# Altium PCB PCB01.PcbDoc
Units mil, origin at the board's own origin, x right, y up, seen from the top; angles counter-clockwise.
Board outline 3937.01 x 3937.01 mil, 2 copper layers (Top Layer, Bottom Layer); 3 components, 2 nets, 6 pads, 0 vias.
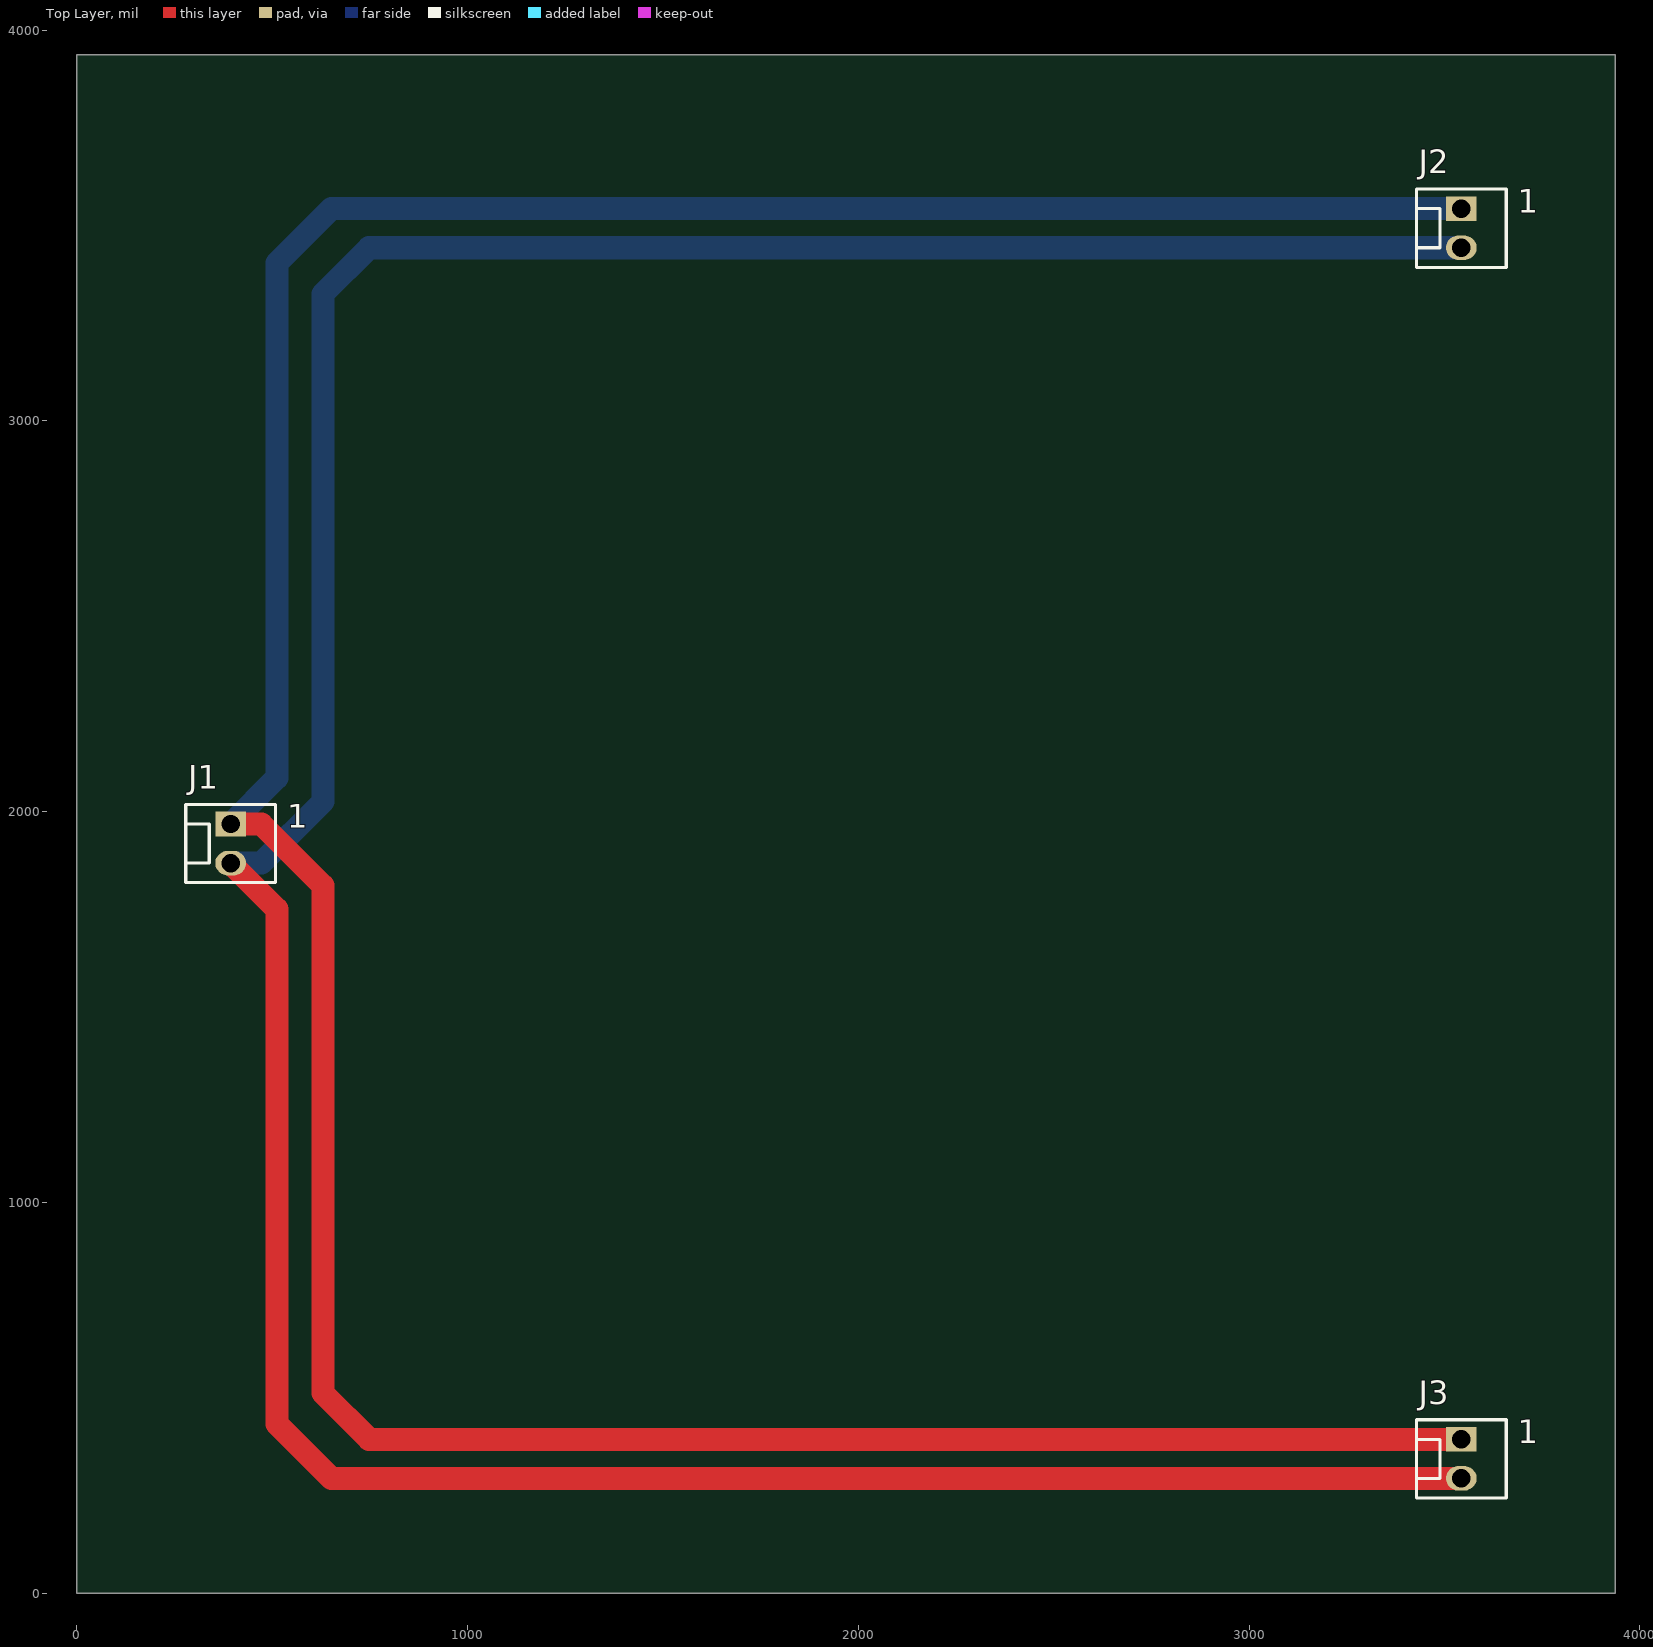
[diagram p0: Top Layer view]
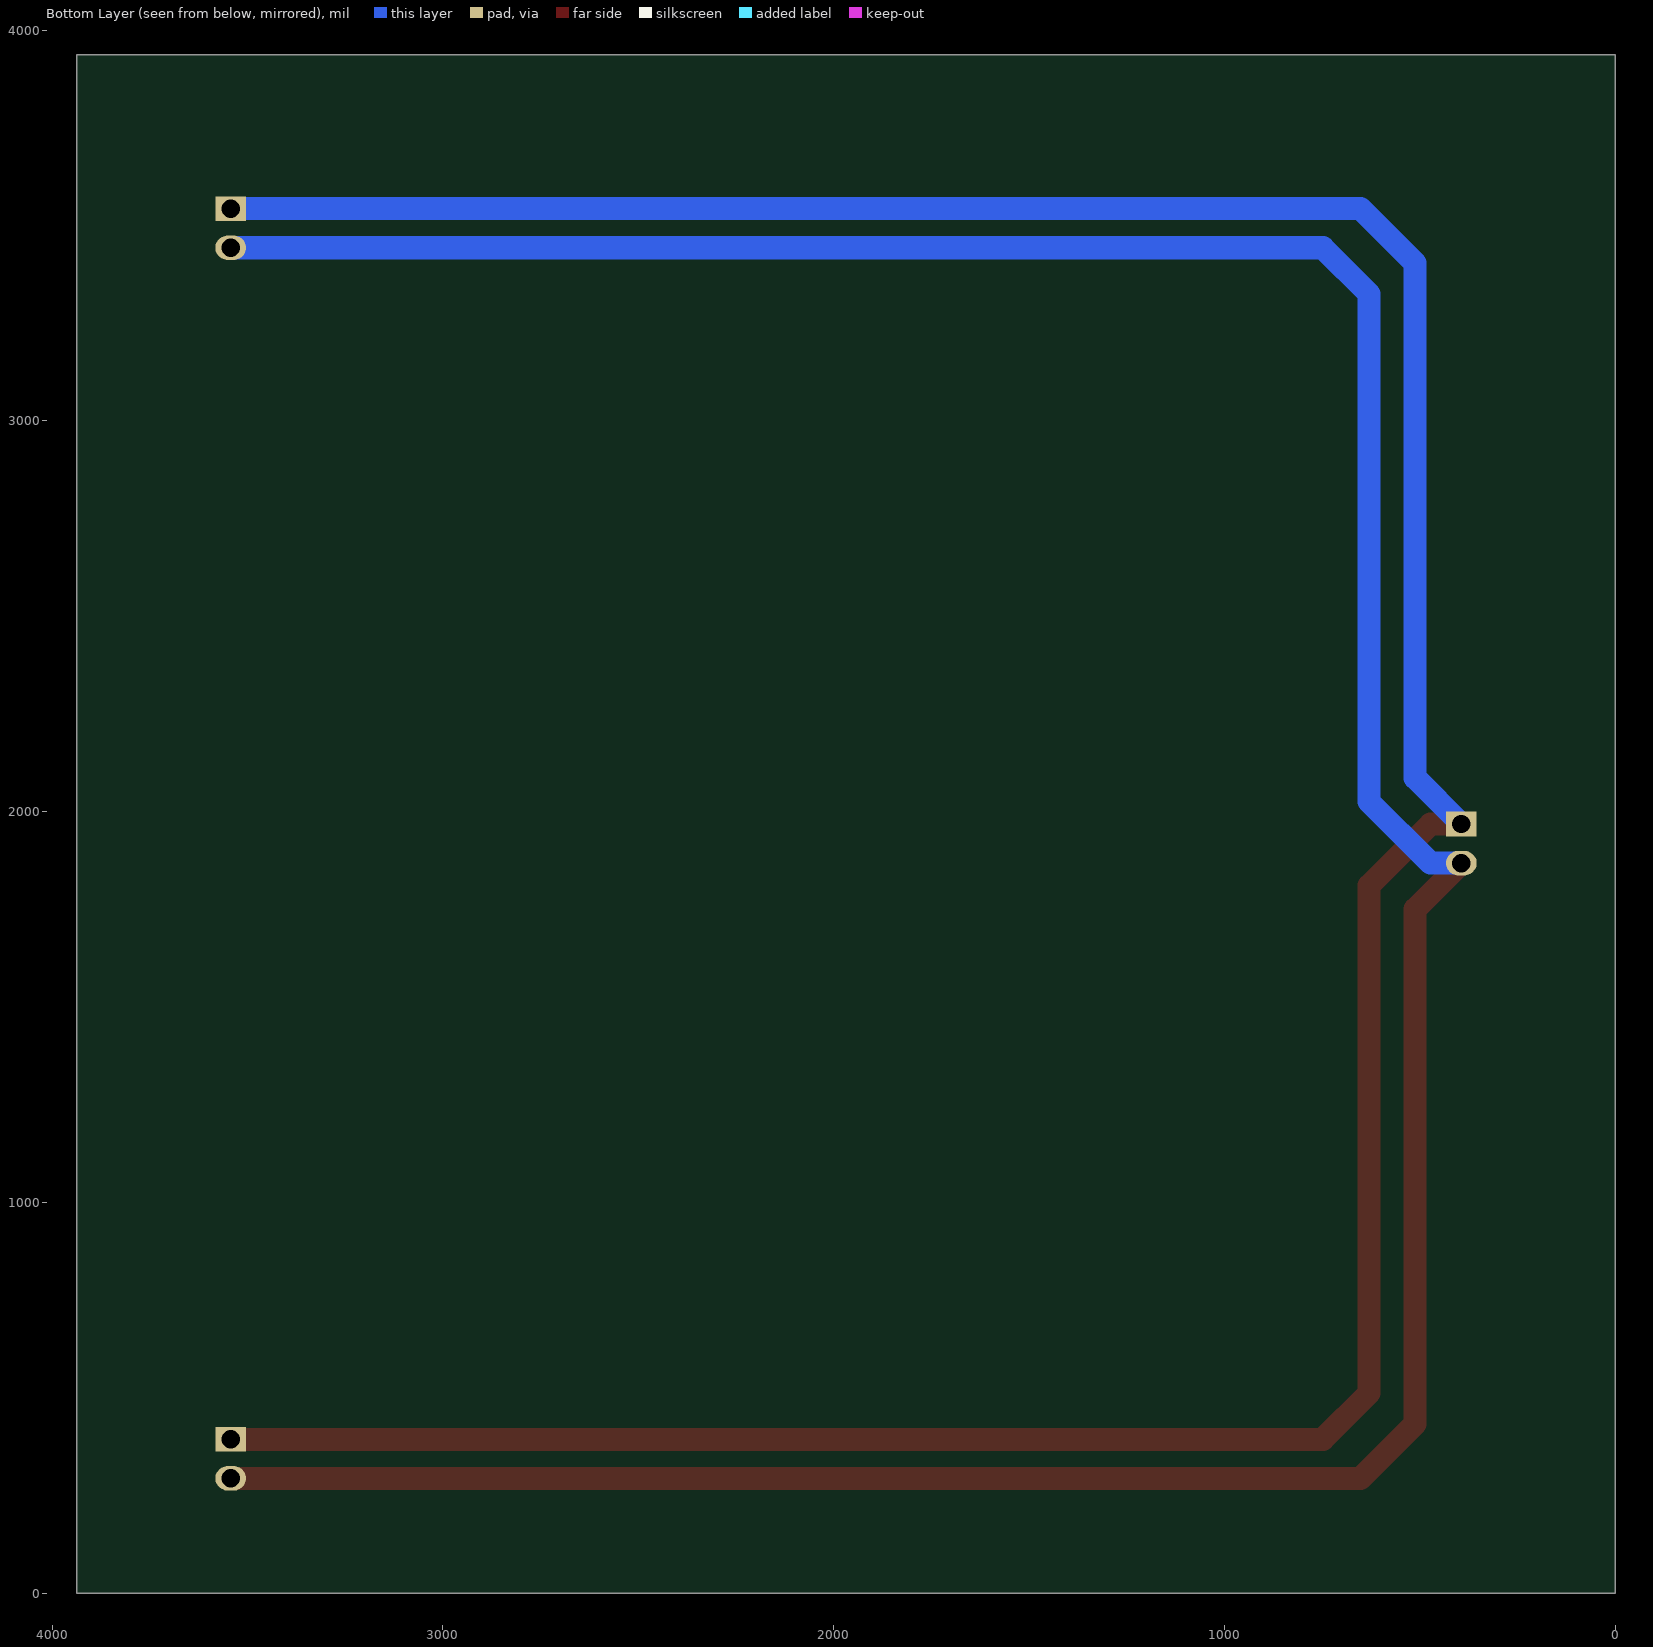
[diagram p1: Bottom Layer view, seen from below]
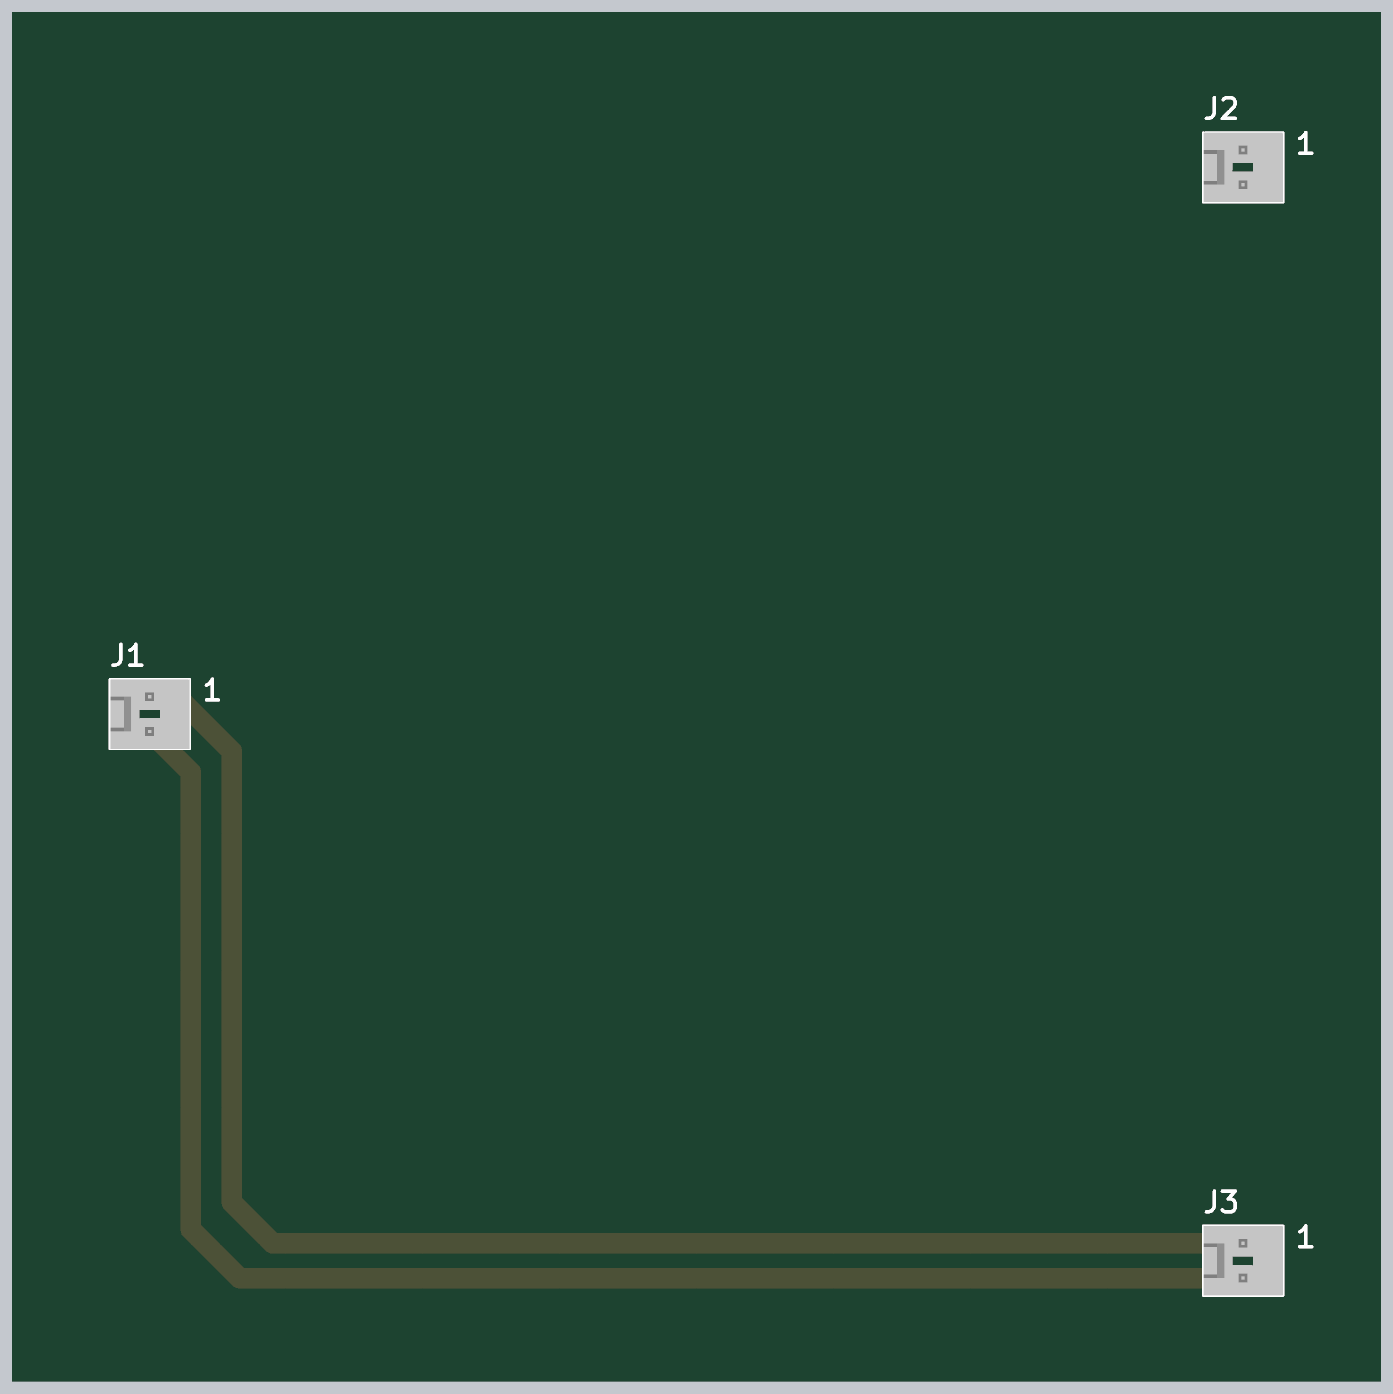
[diagram p2: 3D render of the assembled board from above, using the file's embedded part models]

## Layer stack, top to bottom
Top Solder: solder mask 0.4, Solder Resist, Dk 3.5
Top Layer: signal copper 1.4
Dielectric 1: dielectric 12.6, FR-4, Dk 4.8
Bottom Layer: signal copper 1.4
Bottom Solder: solder mask 0.4, Solder Resist, Dk 3.5

## Board outline
0,0 3937.01,0 3937.01,3937.01 0,3937.01

## Design rules (kind name [scope] priority, off if disabled: settings)
Clearance [All] p1: gap=3.94 ignorepadtopadclearanceinfootprint=FALSE
PolygonConnect [All] p1: connectstyle=Relief reliefconductorwidth=10 reliefentries=4 polygonreliefangle="90 Angle" airgapwidth=10
RoutingVias [All] p1: holewidth=28 width=50 viastyle="Through Hole" minholewidth=28 minwidth=50 maxholewidth=28 maxwidth=50
SolderMaskExpansion [All] p1: expansion=4 istentingtop=FALSE
Width [All] p1: maxlimit=1968.5 minlimit=3.94 preferedwidth=11.81
30 further rules are at their usual default settings.

## Components (designator, comment, footprint, x,y, rotation, side; value= is the part's Value field where it differs from the comment)
J1 "1x2 Header" HDR1X2 393.7,1968.5 r0 top
J2 "1x2 Header" HDR1X2 3543.31,3543.31 r0 top
J3 "1x2 Header" HDR1X2 3543.31,393.7 r0 top

## Footprints (in the part's own frame and the unit in brackets; to place one, negate y for a bottom-side part, rotate by r counter-clockwise, add the part's x,y. Pads: shape width x height; smd on the part's side, far side on the other; paste and mask are expansions set on the pad)
HDR1X2 [mm]
  rect 2x1.6 hole 1.2: 1(0,0)
  oval 2x1.6 hole 1.2: 2(0,-2.54)
  silkscreen extent -2.92,-3.81 2.92,1.27, body extent -2.9,-3.81 2.9,1.27, height 11.71

## Part data
J1 J2 J3: library part 22-29-2021, "Headers & Wire Housings 2 PIN F/LK HEADER", Colour=White, Contact Resistance=10mR, Current Rating=4A, Flammability Rating="UL94 V-0", Manufacturer=Molex, Max Operating Temperature=75°C, Max Voltage Rating (AC)=250V, Min Operating Temperature=0°C, Package Quantity=2500, Supplier Part Number 1=WM2744-ND, Category=Connectors, ComponentLink1Description=https://datasheet.ciiva.com/30169/113840022292021-pcb-headers-30169888.pdf, ComponentLink1URL=https://datasheet.ciiva.com/30169/113840022292021-pcb-headers-30169888.pdf, ComponentLink2Description=https://datasheet.ciiva.com/19472/879588-19472951.pdf, ComponentLink2URL=https://datasheet.ciiva.com/19472/879588-19472951.pdf, ComponentLink3Description=https://datasheet.ciiva.com/11752/0900766b80d5fb7a-11752634.pdf, ComponentLink3URL=https://datasheet.ciiva.com/11752/0900766b80d5fb7a-11752634.pdf, ComponentLink4Description=https://datasheet.ciiva.com/5153/0022292021-pcb-headers-159390-5153053.pdf, ComponentLink4URL=https://datasheet.ciiva.com/5153/0022292021-pcb-headers-159390-5153053.pdf, ComponentLink5Description=https://datasheet.ciiva.com/9468/0022292021-pcb-headers-9468301.pdf, ComponentLink5URL=https://datasheet.ciiva.com/9468/0022292021-pcb-headers-9468301.pdf, ComponentLink6Description=https://datasheet.ciiva.com/25908/0022292021-pcb-headers-25908286.pdf, ComponentLink6URL=https://datasheet.ciiva.com/25908/0022292021-pcb-headers-25908286.pdf, Contact Material=Brass, Contact Plating=Gold, Depth=5.8mm, Gender=Male, Glow Wire Compliant=Non-compliant, Halogen Free="Low Halogen", Height=11.7mm, Housing Colour=White, Housing Material=Nylon, Lead Free="Lead Free", Length=12.7mm, Manufacturer Part Number=22-29-2021, Max Current Rating=4A, Mount="Through Hole", Number of Circuits=2, Number of Contacts=2, Number of Positions=2, Number of Rows=1, Orientation=Straight, Packaging=Bulk, Pitch=2.54mm, Pricing 1="1=0.46, 10=0.431, 100=0.3014, 500=0.2583, 1000=0.21525, 5000=0.1845, 10000=0.1722 (USD)", Radiation Hardening=No, REACH SVHC=Unknown, Stock 1=17589, Supplier 1=Digi-Key, Termination="Through Hole", Voltage Rating=250V, Voltage Rating (DC)=250V

## Nets (pads, with @x,y where several pads share a name; then routed paths per layer and width w, separated by ;. In a path a pad name is that pad's centre, name@x,y a point inside that pad or via, vN(x,y) a via of type N, cw(c..) or ccw(c..) an arc to the next point about the centre after c; other vN are vias at no path point)
+VCC: J1.1 J2.1 J3.1 | length 9136.6
  Top Layer w59.06: J1.1 472.44,1968.5 629.92,1811.02 629.92,511.81 748.03,393.7 J3.1
  Bottom Layer w59.06: J1.1 511.81,2086.61 511.81,3403.94 651.18,3543.31 J2.1
GND: J1.2 J2.2 J3.2 | length 9136.6
  Top Layer w59.06: J1.2 511.81,1750.39 511.81,433.07 651.18,293.7 J3.2
  Bottom Layer w59.06: J1.2 472.44,1868.5 629.92,2025.98 629.92,3325.2 748.03,3443.31 J2.2

## Silkscreen, mask and mechanical layers (free items; w line width, h text height)
Board:
  the board outline again, w7.87

## Text inside footprints (layer, text, board x,y; h text height)
J1: Top Overlay "1" at 538.7,1958.5 h60
J2: Top Overlay "1" at 3688.31,3533.31 h60
J3: Top Overlay "1" at 3688.31,383.7 h60